# Altium PCB rxcalibrate.PcbDoc
Units mil, origin at the board's own origin, x right, y up, seen from the top; angles counter-clockwise.
Board outline 4846 x 4724 mil, 2 copper layers (Top Layer, Bottom Layer); 104 components, 82 nets, 278 pads, 103 vias.
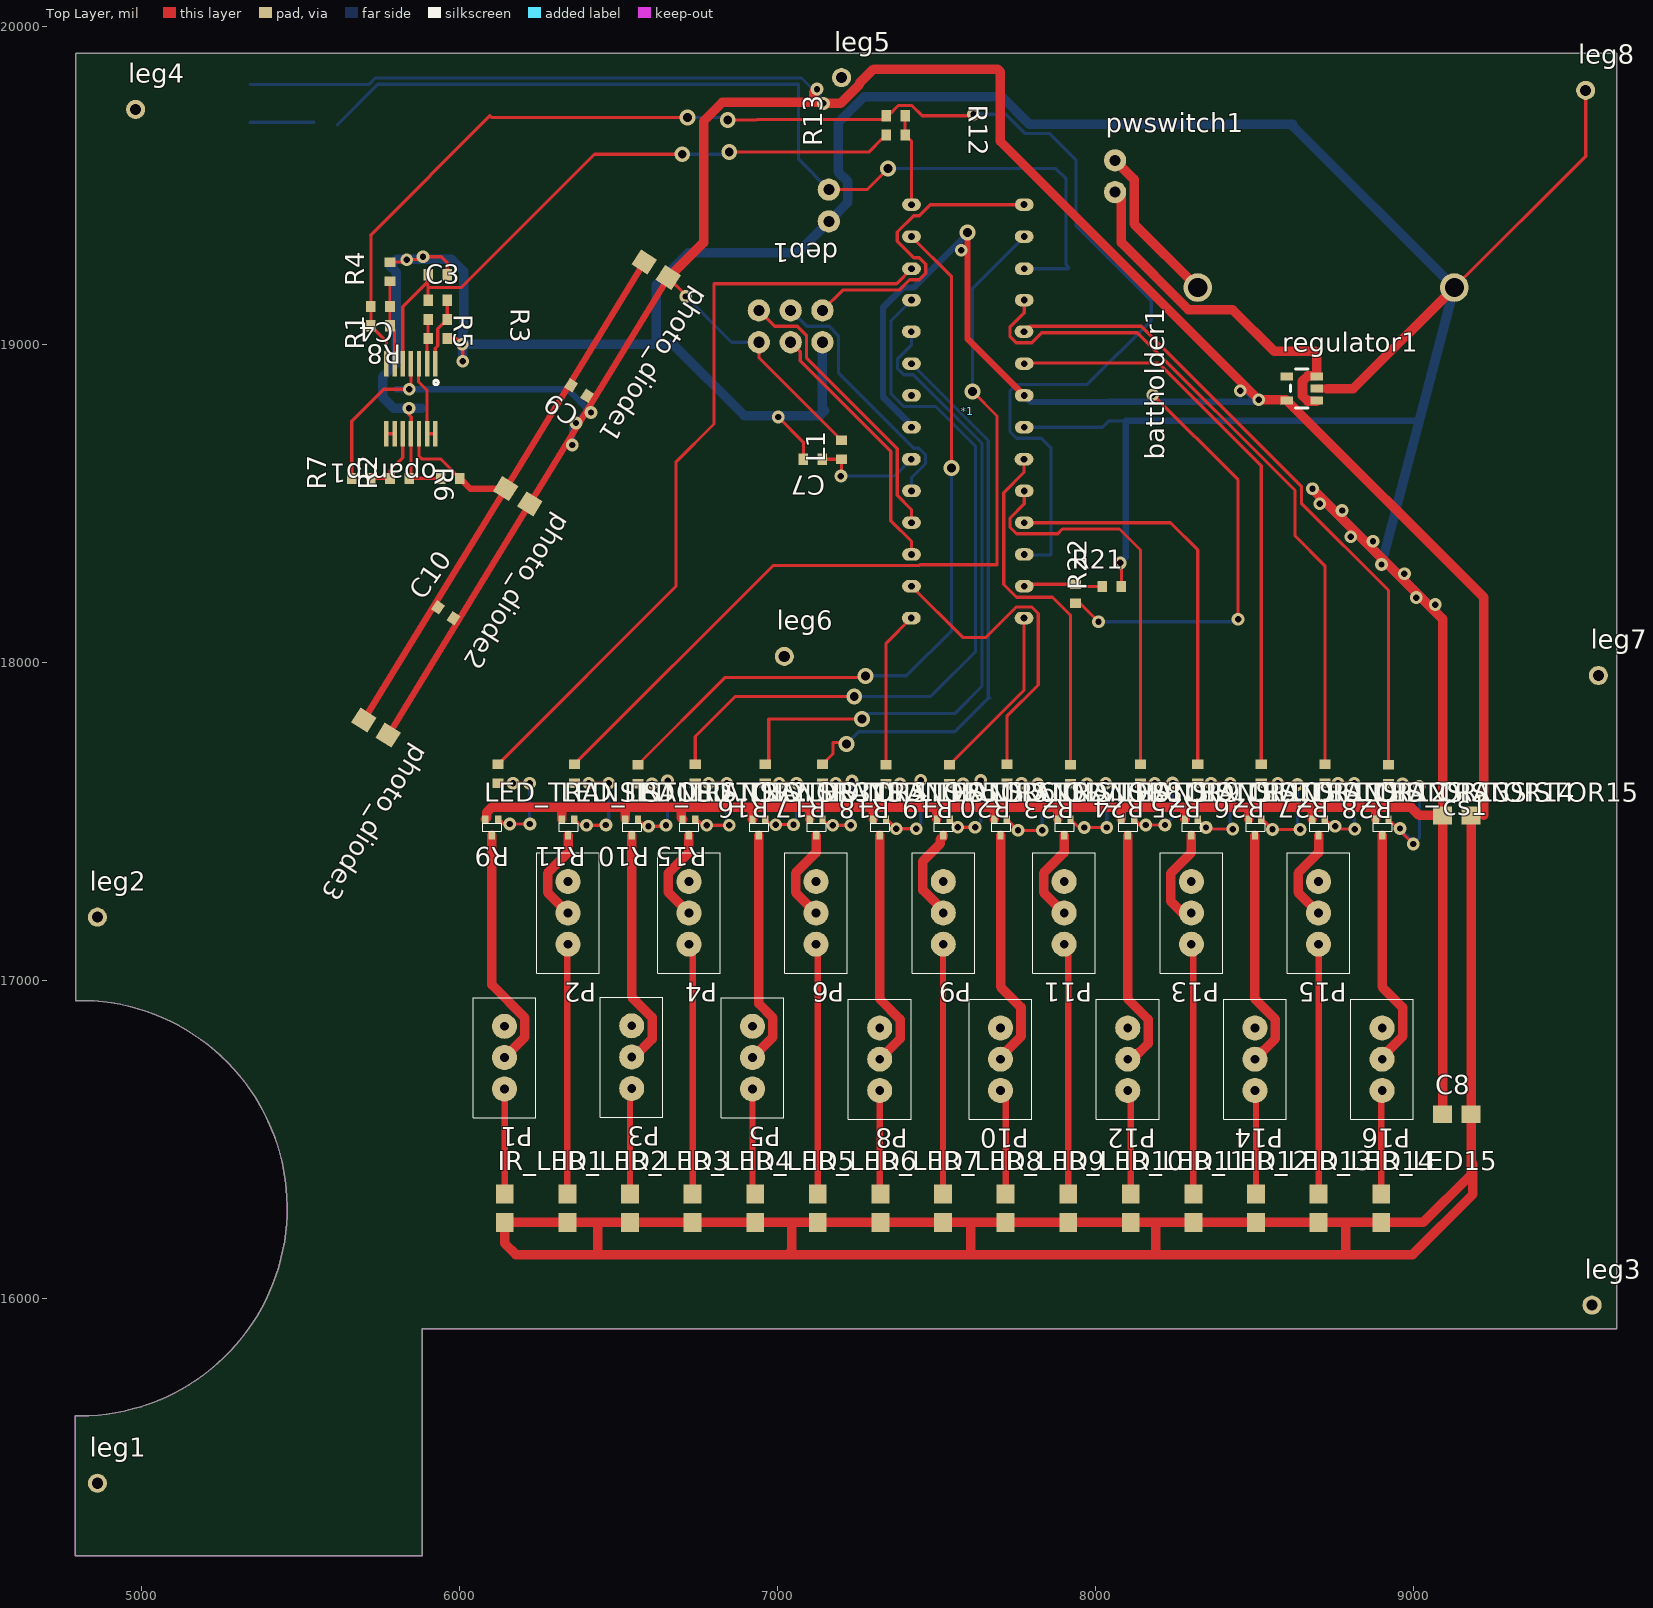
[diagram p0: Top Layer view]
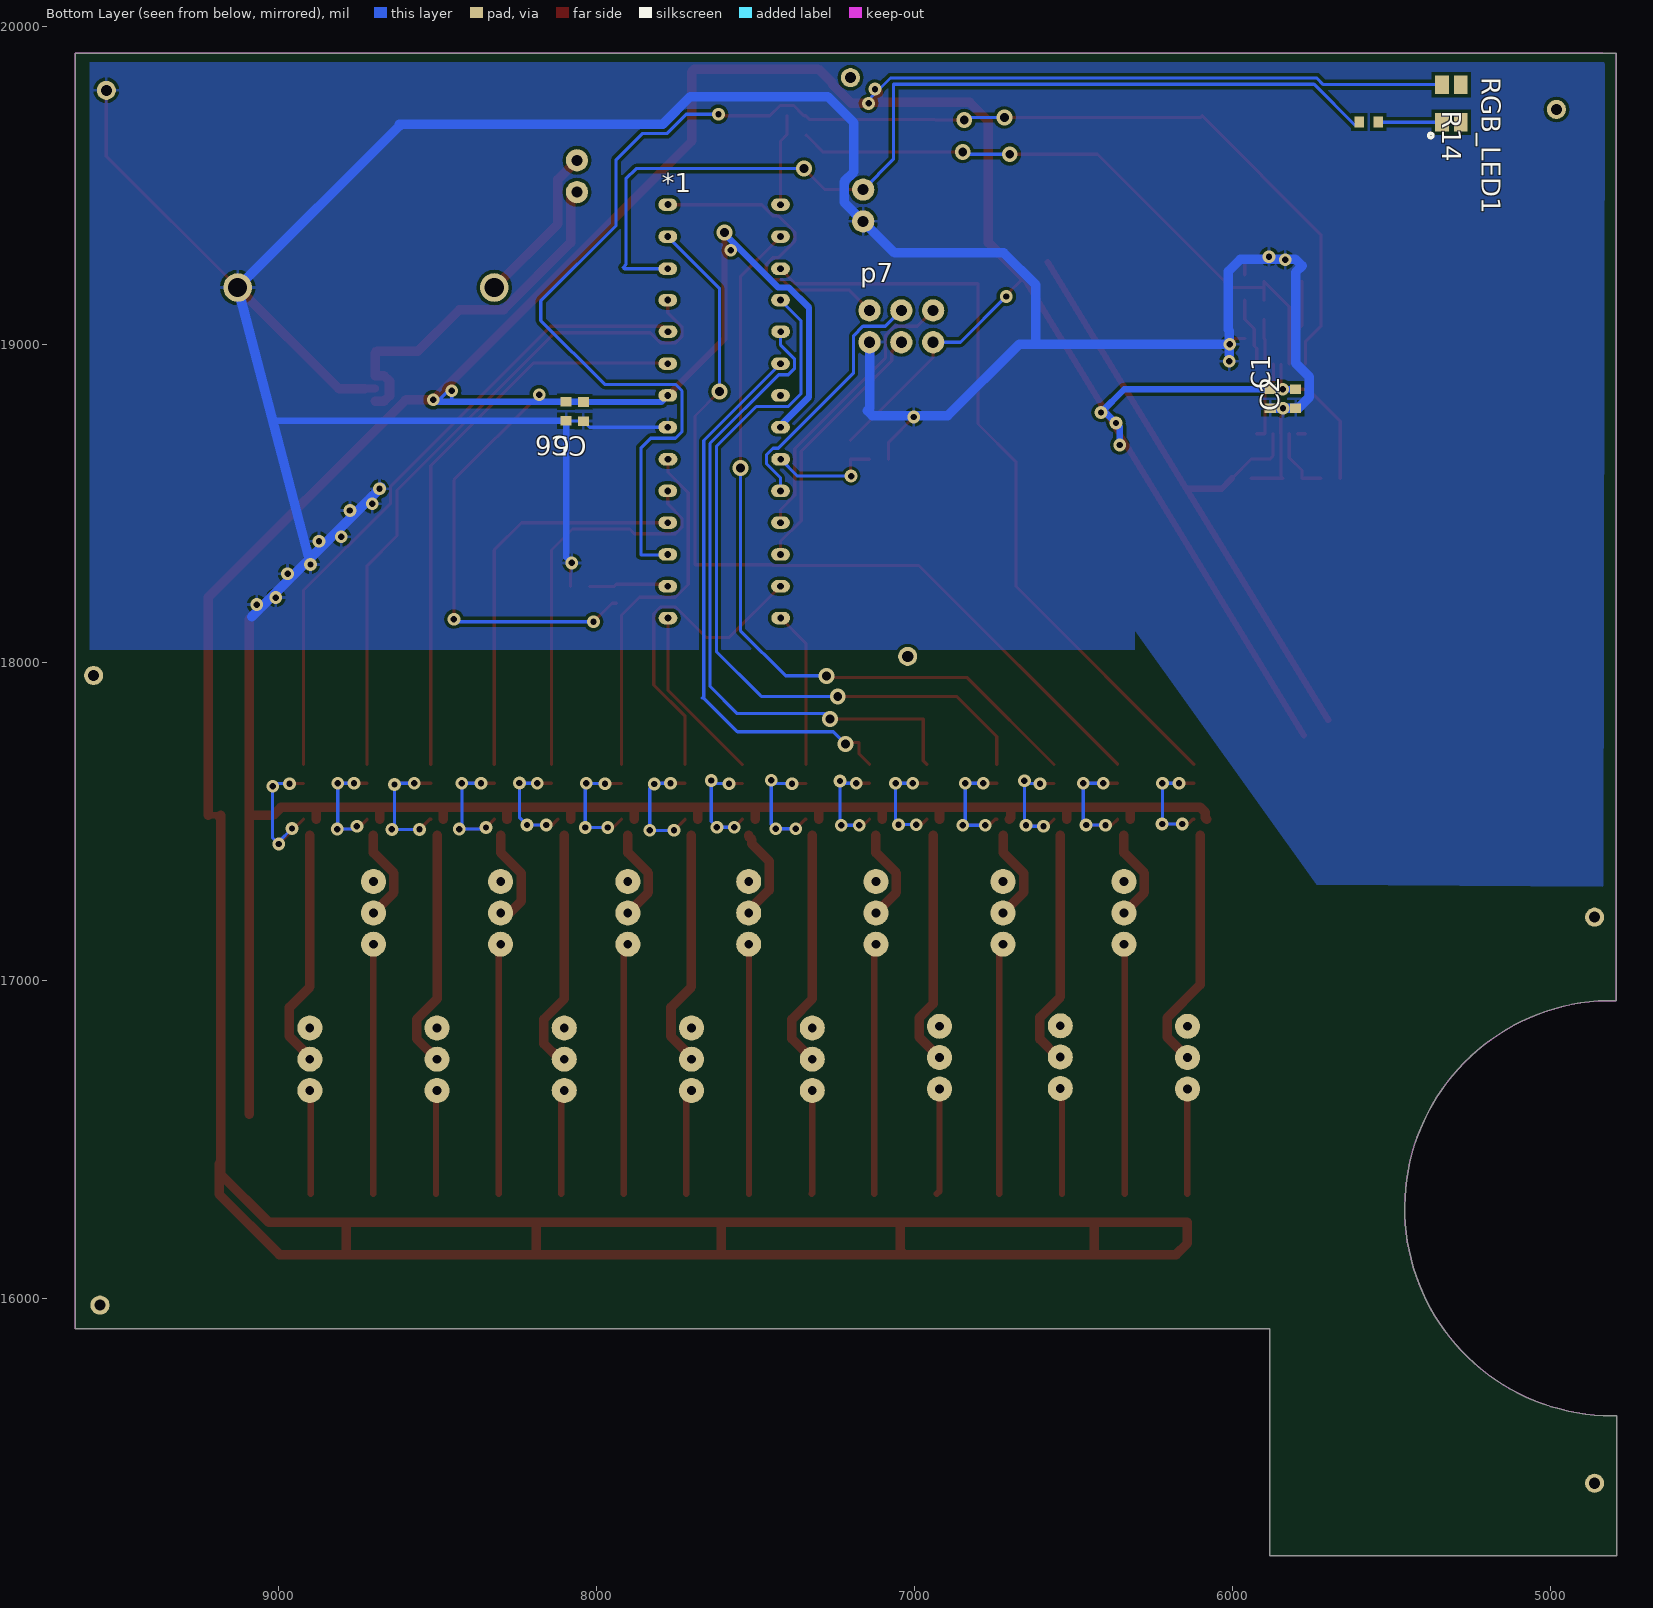
[diagram p1: Bottom Layer view, seen from below]

## Layer stack, top to bottom
Top Layer: signal copper 1.4
Dielectric: dielectric 12.6, FR-4, Dk 4.8
Bottom Layer: signal copper 1.4

## Board outline
4791,15192 4791,15632 4805,15632 ccw(c4804,16285) 4793.09,16937.91 4792,16937.91 4792,19916 9637,19916 9637,15905 5882,15905 5882,15192

## Design rules (kind name [scope] priority, off if disabled: settings)
Clearance [All] p1: gap=10
PolygonConnect [All] p1: connectstyle=Relief reliefconductorwidth=10 reliefentries=4 polygonreliefangle="90 Angle"
RoomDefinition rxcalibrate [InComponentClass('rxcalibrate')] p1: confinementstyle=ConfineIn formatcopy=TRUE lockcomponents=FALSE outline 9682,15220 10033,15220 10033,15428 9682,15428
RoutingVias [All] p1: holewidth=28 width=50 viastyle="Through Hole" minholewidth=28 minwidth=50 maxholewidth=28 maxwidth=50
SilkscreenOverComponentPads [All] p1: minsilkscreentomaskgap=10
SolderMaskExpansion [All] p1: expansion=4
Width [All] p1: maxlimit=30 minlimit=10 preferedwidth=10
27 further rules are at their usual default settings.

## Components (designator, comment, footprint, x,y, rotation, side; value= is the part's Value field where it differs from the comment)
*1 "atmega328_DIP28" atmega328dip 7774.33,19440.55 r180 bottom
battholder1 "battery_holder" Battery_mount 8919,19180 r180 top
C1 "2.2uf" RC0603 5880,18860 r90 bottom
C2 "10000pf" RC0603 5800,18860 r90 bottom
C3 "1000pf" RC0603 5960,19140 r0 top
C4 "160pf" RC0603 5720,19120 r180 top
C5 "10000pf" RC0603 8040,18760 r270 bottom
C6 "2.2uf" RC0603 8094.19,18760.69 r270 bottom
C7 "100nf" RC0603 7080,18640 r180 top
C8 "CAP0805" RC0805_CAP0805(Primary) 9090,16580 r0 top
C9 "2.2uf" RC0603 6349.68,18872.68 r147 top
C10 "2.2uf" RC0603 5930.85,18174.41 r145 top
cs1 "CAP0805" RC0805_CAP0805(Primary) 9090,17520 r0 top
deb1 "debug_plug" debug_conn 7160,19488 r270 top
IR_LED1 "VSMB1940X01" 0805 6141,16240 r90 top
IR_LED2 "VSMB1940X01" 0805 6337.85,16240 r90 top
IR_LED3 "VSMB1940X01" 0805 6534.7,16240 r90 top
IR_LED4 "VSMB1940X01" 0805 6731.55,16240 r90 top
IR_LED5 "VSMB1940X01" 0805 6928.4,16240 r90 top
IR_LED6 "VSMB1940X01" 0805 7125.25,16240 r90 top
IR_LED7 "VSMB1940X01" 0805 7322.1,16240 r90 top
IR_LED8 "VSMB1940X01" 0805 7518.95,16240 r90 top
IR_LED9 "VSMB1940X01" 0805 7715.8,16240 r90 top
IR_LED10 "VSMB1940X01" 0805 7912.65,16240 r90 top
IR_LED11 "VSMB1940X01" 0805 8109.5,16240 r90 top
IR_LED12 "VSMB1940X01" 0805 8306.35,16240 r90 top
IR_LED13 "VSMB1940X01" 0805 8503.2,16240 r90 top
IR_LED14 "VSMB1940X01" 0805 8700.05,16240 r90 top
IR_LED15 "VSMB1940X01" 0805 8896.91,16240 r90 top
L1 "LQM18FN100M00D" RC0603 7200,18700 r90 top
LED_TRANSISTOR1 "PBSS2515E,115" sot416 6100,17457 r90 top
LED_TRANSISTOR2 "PBSS2515E,115" sot416 6340,17457 r90 top
LED_TRANSISTOR3 "PBSS2515E,115" sot416 6540,17457 r90 top
LED_TRANSISTOR4 "PBSS2515E,115" sot416 6720,17457 r90 top
LED_TRANSISTOR5 "PBSS2515E,115" sot416 6940,17457 r90 top
LED_TRANSISTOR6 "PBSS2515E,115" sot416 7120,17457 r90 top
LED_TRANSISTOR7 "PBSS2515E,115" sot416 7320,17457 r90 top
LED_TRANSISTOR8 "PBSS2515E,115" sot416 7520,17457 r90 top
LED_TRANSISTOR9 "PBSS2515E,115" sot416 7700,17457 r90 top
LED_TRANSISTOR10 "PBSS2515E,115" sot416 7900,17457 r90 top
LED_TRANSISTOR11 "PBSS2515E,115" sot416 8100,17457 r90 top
LED_TRANSISTOR12 "PBSS2515E,115" sot416 8300,17457 r90 top
LED_TRANSISTOR13 "PBSS2515E,115" sot416 8500,17457 r90 top
LED_TRANSISTOR14 "PBSS2515E,115" sot416 8700,17457 r90 top
LED_TRANSISTOR15 "PBSS2515E,115" sot416 8900,17457 r90 top
leg1 "leg" leg 4860,15420 r90 top
leg2 "leg" leg 4860,17200 r90 top
leg3 "leg" leg 9560,15980 r90 top
leg4 "leg" leg 4980,19740 r90 top
leg5 "leg" leg 7200,19840 r90 top
leg6 "leg" leg 7020,18020 r90 top
leg7 "leg" leg 9580,17960 r90 top
leg8 "leg" leg 9540,19800 r90 top
opamp1 "MAX4487AUD" TSSOP14 5922.36,18940 r270 top
P1 "pot" POT_PV36W 6140,16856.85 r270 top
P2 "pot" POT_PV36W 6340,17311.85 r270 top
P3 "pot" POT_PV36W 6540,16858.43 r270 top
P4 "pot" POT_PV36W 6720,17311.85 r270 top
P5 "pot" POT_PV36W 6920,16856.85 r270 top
P6 "pot" POT_PV36W 7120,17311.85 r270 top
p7 "program_connector_atmega" Programming_connector 7140,19108 r180 bottom
P8 "pot" POT_PV36W 7320,16851.85 r270 top
P9 "pot" POT_PV36W 7520,17311.85 r270 top
P10 "pot" POT_PV36W 7700,16851.85 r270 top
P11 "pot" POT_PV36W 7900,17311.85 r270 top
P12 "pot" POT_PV36W 8100,16851.85 r270 top
P13 "pot" POT_PV36W 8300,17311.85 r270 top
P14 "pot" POT_PV36W 8500,16851.85 r270 top
P15 "pot" POT_PV36W 8700,17311.85 r270 top
P16 "pot" POT_PV36W 8900,16851.85 r270 top
photo_diode1 "TEMD7100X01" 0805 6580,19260 r327 top
photo_diode2 "TEMD7100X01" 0805 6143.68,18547.69 r328 top
photo_diode3 "TEMD7100X01" 0805 5698,17820 r328 top
pwswitch1 "debug_plug" debug_conn 8060,19480 r90 top
R1 "10 Kohm" RC0603 5900,19020 r180 top
R2 "750 K ohm" RC0603 5940,18580 r180 top
R3 "100Kohm" RC0603 5960,19080 r0 top
R4 "5600 ohm" RC0603 5900,19220 r180 top
R5 "31.6Kohm" RC0603 5780,19060 r0 top
R6 "10Kohm" RC0603 5720,18580 r0 top
R7 "10Kohm" RC0603 5780,18580 r180 top
R8 "2Kohm" RC0603 5780,19200 r270 top
R9 "RES0603" RC0603 6120,17621 r270 top
R10 "RES0603" RC0603 6560,17620 r270 top
R11 "RES0603" RC0603 6360,17621 r270 top
R12 "200 ohm" RC0603 7400,19720 r0 top
R13 "200 ohm" RC0603 7340,19660 r180 top
R14 "RES0603" RC0603 5540,19700 r180 bottom
R15 "RES0603" RC0603 6740,17621 r270 top
R16 "RES0603" RC0603 6960,17621 r270 top
R17 "RES0603" RC0603 7140,17621 r270 top
R18 "RES0603" RC0603 7340,17620 r270 top
R19 "RES0603" RC0603 7540,17620 r270 top
R20 "RES0603" RC0603 7720,17621 r270 top
R21 "20Kohm" RC0603 7936,18247 r90 top
R22 "2210 ohm" RC0603 8020,18240 r180 top
R23 "RES0603" RC0603 7920,17620 r270 top
R24 "RES0603" RC0603 8140,17621 r270 top
R25 "RES0603" RC0603 8320,17621 r270 top
R26 "RES0603" RC0603 8520,17621 r270 top
R27 "RES0603" RC0603 8720,17621 r270 top
R28 "RES0603" RC0603 8920,17620 r270 top
regulator1 "TC1016-3.0VCTTR" SOT23-5 8694.49,18825.2 r90 top
RGB_LED1 "LATBT66C-RS-1+ST7-35+P7Q7-35-20-R18-ZB" rgb_led 5340,19818 r180 bottom

## Footprints (in the part's own frame and the unit in brackets; to place one, negate y for a bottom-side part, rotate by r counter-clockwise, add the part's x,y. Pads: shape width x height; smd on the part's side, far side on the other; paste and mask are expansions set on the pad)
0805 [mil]
  rect 60x56 smd: 1(0,0) 2(90,0)
atmega328dip [mm]
  oval 1.5x1 hole 0.55 paste+0 mask+0.001: 0(0,0)
  oval 1.5x1 smd far side paste+0 mask+0.001: 0(0,0)
  oval 1.5x1 hole 0.54 paste+0 mask+0.001: 1(0.003,-2.548) 2(0,-5.12) 3(0,-7.62) 4(0.013,-10.142) 5(0,-12.7) 6(0,-15.24) 7(0,-17.78) 8(0.013,-20.334) 9(0,-22.86) 10(0,-25.4) 11(0,-27.94) 12(0,-30.48) 13(0.013,-33.018) 14(9.013,-33.018) 15(9,-30.48) 16(9,-27.94) 17(9,-25.4) 18(9,-22.86) 19(9.013,-20.334) 20(9,-17.78) 21(9,-15.24) 22(9,-12.7) 23(9.013,-10.142) 24(9,-7.62) 25(9,-5.12) 26(9.003,-2.548) 27(9,0)
Battery_mount [mil]
  round 90 hole 60: 1(599,0) 2(-208,0)
debug_conn [mil]
  round 70 hole 35: 1(0,0) 2(100,0)
leg [mil]
  round 60 hole 35: 1(0,0)
POT_PV36W [mm]
  round 2 hole 0.7 paste+0 mask+0.001: 0(0,0) 1(2.5,0) 2(5,0)
  silkscreen extent -2.3,-2.5 7.3,2.5
Programming_connector [mil]
  round 70 hole 35: 1(0,0) 2(100,0) 3(200,0) 4(200,-100) 5(100,-100) 6(0,-100)
RC0603 [mil]
  rect 30x35 smd: 1(0,0) 2(-60,0)
RC0805_CAP0805(Primary) [mil]
  rect 60x56 smd: A(0,0) B(90,0)
rgb_led [mil]
  rect 43x59 smd: 1(0,-118) 2(0,0) 3(59,0) 4(59,-118)
  silkscreen extent -42,-167 -28,-153
SOT23-5 [mil]
  rect 25x40 smd: 1(0,0) 2(37.4,0) 3(74.8,0) 4(74.8,94.49) 5(0,94.49)
  silkscreen extent -24,28 98,83
sot416 [mil]
  rect 24x20 smd: 1(51,-20) 2(51,20) 3(0,0)
  silkscreen extent 13,-30 38,30
TSSOP14 [mil]
  rect 80x14 smd: 1(0,0) 2(0,-25.59) 3(0,-51.18) 4(0,-76.77) 5(0,-102.36) 6(0,-127.95) 7(0,-153.54) 8(220,-153.54) 9(220,-127.95) 10(220,-102.36) 11(220,-76.77) 12(220,-51.18) 13(220,-25.59) 14(220,0)
  silkscreen extent 52,-4 65,9

## Part data
C1 C2 C3 C4 C5 C6 C7 C9 C10: library part CAP0603, "CAP0603"
IR_LED1 IR_LED2 IR_LED3 IR_LED4 IR_LED5 IR_LED6 IR_LED7 IR_LED8 IR_LED9 IR_LED10 IR_LED11 IR_LED12 IR_LED13 IR_LED14 IR_LED15: library part IRtx
L1: library part IND0603, "IND0603"
LED_TRANSISTOR1 LED_TRANSISTOR2 LED_TRANSISTOR3 LED_TRANSISTOR4 LED_TRANSISTOR5 LED_TRANSISTOR6 LED_TRANSISTOR7 LED_TRANSISTOR8 LED_TRANSISTOR9 LED_TRANSISTOR10 LED_TRANSISTOR11 LED_TRANSISTOR12 LED_TRANSISTOR13 LED_TRANSISTOR14 LED_TRANSISTOR15: library part transistor_led
opamp1: library part opamp
photo_diode1 photo_diode2 photo_diode3: library part IRrx
R1 R6 R7: library part RES0603, "RES0603 10Kohm"
R2: library part RES0603, "RES0603 750000 ohm"
R3: library part RES0603, "RES0603 100Kohm"
R4: library part RES0603, "RES0603 5600 ohm"
R5: library part RES0603, "RES0603 31.6Kohm"
R8: library part RES0603, "RES0603 2Kohm"
R12 R13: library part RES0603, "RES0603 200 ohm"
R21: library part RES0603, "RES0603 20Kohm"
R22: library part RES0603, "RES0603 2210 ohm"
regulator1: library part regulator_w_switch
RGB_LED1: library part rgb_led

## Via types
v1: diameter 40, hole 20, Top Layer to Bottom Layer, 91 vias
v2: diameter 50, hole 28, Top Layer to Bottom Layer, 12 vias

## Nets (pads, with @x,y where several pads share a name; then routed paths per layer and width w, separated by ;. In a path a pad name is that pad's centre, name@x,y a point inside that pad or via, vN(x,y) a via of type N, cw(c..) or ccw(c..) an arc to the next point about the centre after c; other vN are vias at no path point)
GND: *1.7 battholder1.2 C1.2 C2.2 C5.1 C6.1 C7.1 C8.A cs1.A deb1.2 LED_TRANSISTOR1.2 LED_TRANSISTOR2.2 LED_TRANSISTOR3.2 LED_TRANSISTOR4.2 LED_TRANSISTOR5.2 LED_TRANSISTOR6.2 LED_TRANSISTOR7.2 LED_TRANSISTOR8.2 LED_TRANSISTOR9.2 LED_TRANSISTOR10.2 LED_TRANSISTOR11.2 LED_TRANSISTOR12.2 LED_TRANSISTOR13.2 LED_TRANSISTOR14.2 LED_TRANSISTOR15.2 leg8.1 opamp1.11 p7.6 R1.2 R2.1 R4.2 R7.2 R8.2 R22.2 regulator1.2 | length 17113.6
  Top Layer w10: R8.2 5826,19260 5834,19268 v1@5892,19268 ; v1(5840,18800) 5840,18780 5847,18773 5847,18721.41 opamp1.11 5845.59,18585.59 R7.2 R2.1 ; v1(5884,19277) 5941,19277 5962,19256 5960,19254 R4.2 ; R1.2 5989,19020 6009,19000 v1(6009,18948) ; v1(7001,18773) 7080,18694 C7.1 ; v1(8076,18314) 8080,18310 R22.2 ; battholder1.2 9540,19593 leg8.1
  Top Layer w24: regulator1.2 8724.94,18862.6 8725.54,18862
  Top Layer w30: LED_TRANSISTOR1.2 6085,17513 6085,17530.36 6099.64,17545 8991,17545 9016,17520 cs1.A ; 6318,17545 6320,17543 LED_TRANSISTOR2.2 ; 6516,17545 6520,17541 LED_TRANSISTOR3.2 ; 6696,17545 6696,17512 LED_TRANSISTOR4.2 ; 6917,17545 6920,17542 LED_TRANSISTOR5.2 ; 7097,17545 7100,17542 LED_TRANSISTOR6.2 ; 7298,17545 7300,17543 LED_TRANSISTOR7.2 ; 7491,17545 7500,17536 LED_TRANSISTOR8.2 ; LED_TRANSISTOR9.2 7680,17541 7684,17545 ; LED_TRANSISTOR10.2 7880,17543 7882,17545 ; 8077,17545 8080,17542 LED_TRANSISTOR11.2 ; 8272,17545 8280,17537 LED_TRANSISTOR12.2 ; LED_TRANSISTOR13.2 8480,17537 8488,17545 ; 8675,17545 8680,17540 LED_TRANSISTOR14.2 ; v1(8681,18547) 9090,18138 cs1.A ; 8725.54,18862 8809,18862 battholder1.2 ; 8879,17545 8880,17544 LED_TRANSISTOR15.2 ; C8.A cs1.A
  Bottom Layer w10: *1.7 8020.55,18740.55 C5.1 8093.5,18760 C6.1
  Bottom Layer w20: v1(8076,18314) 8094.19,18332.19 C6.1 9012.86,18760.69 9015.94,18757.6
  Bottom Layer w30: C1.2 C2.2 5792.14,18800 5757.5,18834.64 5757.5,18900 5800,18942.5 5800,19228 5780,19248 5801,19269 5974,19269 6012,19231 6012,19047 6009,19044 6009,18968 ; v1(6007,19002) 6669,19002 6894,18777 7131,18777 7147,18793 7140,18800 p7.6 ; 6617,19002 6617,19188 6718,19289 7061,19289 deb1.2 7220,19448 7220,19512.85 7189,19543.85 7189,19698 7271,19780 7704,19780 7790,19694 8619,19694 8619,19688 battholder1.2 v1(8898,18309) ; v1@8676.26,18551.47 v1(8681,18547) 9082,18145
  other v1: 9067,18183 9007,18205 8970,18280 8871,18382 8801,18396 8774,18479 8704,18500 5833,19267
Net*1_0: *1.0 p7.1 | length 984.1
  Top Layer w10: p7.1 7204,19172 7381.31,19172 7413.6,19204.29 7444.21,19204.29 7464.53,19224.61 7464.53,19253.34 7444.21,19273.66 7427.56,19273.66 7375.35,19325.87 7375.35,19354.6 7426.62,19405.87 7444.21,19405.87 7478.89,19440.55 *1.0@7774.33,19440.55
Net*1_1: *1.1 R11.2 | length 2720
  Top Layer w10: R11.2 6984.87,18305.87 7444.21,18305.87 7446.34,18308 7689,18308 7689,18776 v2(7612,18853)
  Bottom Layer w10: v2(7612,18853) 7612,19178.02 *1.1
Net*1_2: *1.2 deb1.1 R14.2 | length 3084.6
  Top Layer w10: deb1.1 7280,19488 v2(7346,19554)
  Bottom Layer w10: 5615,19692 5742,19819 7065,19819 7065,19583 deb1.1 ; v2(7346,19554) 7874,19554 7906,19522 7906,19252 7915,19243 7910.98,19238.98 *1.2
Net*1_3: *1.3 R27.2 | length 2155.8
  Top Layer w10: *1.3 7774.33,19100.67 7729.29,19055.63 7729.29,19026.89 7749.61,19006.57 7798.03,19006.57 7829.45,19038 8130,19038 8626,18542 8626,18399.22 8720,18305.22 R27.2
Net*1_4: *1.4 R28.2 | length 2076
  Top Layer w10: *1.4 7790.56,19058 8143,19058 8646,18555 8646,18501.5 8920,18227.5 R28.2
Net*1_5: *1.5 R26.2 | length 1818.8
  Top Layer w10: *1.5 7776.14,18942.36 8197.36,18942.36 8520,18619.72 R26.2
Net*1_8: *1.8 R23.2 | length 1159.1
  Top Layer w10: 7709.8,18417.9 7709.8,18534.92 7773.82,18598.93 *1.8 ; 7709.8,18437 7709.8,18246.18 7750.12,18205.87 7863.42,18205.87 7903.5,18165.79 7920,18149.29 R23.2
Net*1_9: *1.9 R24.2 | length 1258.4
  Top Layer w10: *1.9 7774.33,18499.45 7729.8,18454.92 7729.8,18426.18 7750.12,18405.87 7879.65,18405.87 7894.33,18420.55 8074,18420.55 8140,18354.55 R24.2
Net*1_10: *1.10 R25.2 | length 1255.1
  Top Layer w10: *1.10 8234.45,18440.55 8320,18355 R25.2
Net*1_11: *1.11 C4.1 opamp1.7 R5.2 R12.2 | length 4738.2
  Top Layer w10: opamp1.7 5768.82,19011.18 R5.2 C4.1 5720,19344 5719,19345 6094,19720 6099,19715 v2(6716,19715) ; v2(6842,19707) 6933,19707 6934,19708 7328,19708 R12.2 7346.29,19720 7378.79,19752.5 7421.21,19752.5 7453.71,19720 7610,19720 v1(7615,19725)
  Bottom Layer w10: v2(6716,19715) 6834,19715 v2(6842,19707) ; v1(7615,19725) 7716.57,19725 7777.57,19664 7855,19664 7937,19582 7937,19375 8174,19138 8174,19076 7973.24,18875.24 7750.12,18875.24 7729.8,18854.92 7729.8,18726.18 7750.12,18705.87 7827.91,18705.87 7859,18674.78 7859,18339 7775.88,18339 *1.11
Net*1_12: *1.12 R21.1 R22.1 | length 251.2
  Top Layer w10: *1.12 7780.78,18247 R21.1 7943,18240 R22.1
Net*1_13: *1.13 R19.2 | length 557.5
  Top Layer w10: R19.2 7773.82,17913.82 *1.13
Net*1_14: *1.14 R18.2 | length 493.6
  Top Layer w10: R18.2 7340,18061.14 *1.14
Net*1_15: *1.15 R20.2 | length 1027.5
  Top Layer w10: *1.15 7580.63,18079.92 7654.22,18079.92 7749.61,18175.31 7798.03,18175.31 7818.35,18155 7818.35,17930.06 7720,17831.72 R20.2
Net*1_16: *1.16 p7.5 | length 824.8
  Top Layer w10: p7.5 7070,18978 7070,18949.72 7354.96,18664.76 7354.96,18446.7 7420,18381.66 *1.16
Net*1_17: *1.17 p7.3 | length 907.7
  Top Layer w10: p7.3 6990,19058 7060.71,19058 7090,19028.71 7090,18958 7374.96,18673.04 7374.96,18526.7 7420,18481.66 *1.17
Net*1_18: *1.18 p7.2 | length 812.5
  Bottom Layer w10: p7.2 7090,19058 7160.71,19058 7190,19028.71 7190,18911.66 7426.97,18674.69 7443.7,18674.69 7464.02,18654.37 7464.02,18625.63 7420,18581.62 *1.18
Net*1_19: *1.19 C7.2 L1.2 | length 357.3
  Top Layer w10: C7.2 L1.2 7200,18589 v1(7198,18587)
  Bottom Layer w10: v1(7198,18587) 7366.49,18587 *1.19
Net*1_22: *1.22 R17.2 | length 1787.6
  Top Layer w10: R17.2 7173,17714 7173,17749 7212,17749 v2(7216,17745)
  Bottom Layer w10: v2(7216,17745) 7254,17783 7555.57,17783 7661.57,17889 ; *1.22 7661.57,18698.98 7661.57,17889 ; 7666,17889 7661.57,17889
Net*1_23: *1.23 R16.2 | length 2121.3
  Top Layer w10: R16.2 6971,17692 6971,17823 v2(7264,17823)
  Bottom Layer w10: v2(7264,17823) 7281,17840 7556,17840 7641.57,17925.57 7641.57,18690 7425.7,18905.87 7395.79,18905.87 7375.47,18926.18 7375.47,18954.92 7419.49,18998.93 *1.23
Net*1_24: *1.24 R15.2 | length 2379.9
  Top Layer w10: R15.2 6740,17768 6866,17894 v2(7240,17894)
  Bottom Layer w10: v2(7240,17894) 7480,17894 7485,17899 7621.57,18035.57 7621.57,18680 7495.7,18805.87 7395.79,18805.87 7355.47,18846.18 7355.47,19075.94 7420,19140.47 *1.24
Net*1_25: *1.25 R9.2 | length 2432.7
  Top Layer w10: R9.2 6679,18240 6679,18631 6799,18751 6799,19192 7373.02,19192 *1.25
Net*1_26: *1.26 R10.2 | length 2453
  Top Layer w10: R10.2 6834,17954 7272,17954 7275,17957 v2(7275,17959) ; *1.26 7546,19214.12 v2(7546,18612)
  Bottom Layer w10: v2(7275,17959) 7404,17959 7546,18101 v2(7546,18612)
Net*1_27: *1.27 R12.1 R13.2 | length 287.7
  Top Layer w10: R12.1 R13.2 7420,19640 *1.27
Netbattholder1_1: battholder1.1 pwswitch1.2 | length 507.7
  Top Layer w30: pwswitch1.2 8120,19520 8120,19380 battholder1.1
NetC3_1: C3.1 opamp1.1 R3.1 | length 215.6
  Top Layer w10: opamp1.1 5922.36,18988.65 5930,18996.29 5930,19050 R3.1 C3.1
NetC3_2: C3.2 opamp1.5 R4.1 R13.1 | length 1992
  Top Layer w10: opamp1.5 5820,19120 5900,19200 5900,19180 ; C3.2 5900,19180 ; v2(6699,19599) 6423,19599 6004,19180 5900,19180 ; v2(6847,19606) 7286,19606 7332,19652 R13.1
  Bottom Layer w10: v2(6699,19599) 6840,19599 v2(6847,19606)
NetC4_2: C4.2 opamp1.6 R5.1 R8.1 | length 266
  Top Layer w10: R8.1 R5.1 5794.41,19045.59 opamp1.6
NetC9_1: C9.1 C10.1 opamp1.12 photo_diode1.1 photo_diode2.1 photo_diode3.1 R2.2 | length 2073.6
  Top Layer w10: opamp1.12 5871.18,18649.82 5880,18641 5939,18641 R2.2
  Top Layer w20: photo_diode3.1 photo_diode2.1 ; R2.2 6032.31,18547.69 photo_diode2.1 ; photo_diode1.1 photo_diode2.1
NetIR_LED1_2: IR_LED1.2 P1.2 | length 330.4
  Top Layer w20: P1.2 6141,16659 IR_LED1.2
NetIR_LED2_2: IR_LED2.2 P2.2 | length 785.9
  Top Layer w20: IR_LED2.2 6337.85,17112.85 P2.2
NetIR_LED3_2: IR_LED3.2 P3.2 | length 333.8
  Top Layer w20: IR_LED3.2 6534.7,16656.27 P3.2
NetIR_LED4_2: IR_LED4.2 P4.2 | length 789.8
  Top Layer w20: P4.2 6731.55,17103.45 IR_LED4.2
NetIR_LED5_2: IR_LED5.2 P5.2 | length 333.5
  Top Layer w20: P5.2 6920,16338.4 IR_LED5.2
NetIR_LED6_2: IR_LED6.2 P6.2 | length 787.2
  Top Layer w20: P6.2 7125.25,17109.75 IR_LED6.2
NetIR_LED7_2: IR_LED7.2 P8.2 | length 325.9
  Top Layer w20: P8.2 7320,16332.1 IR_LED7.2
NetIR_LED8_2: IR_LED8.2 P9.2 | length 785.4
  Top Layer w20: IR_LED8.2 7518.95,17113.95 P9.2
NetIR_LED9_2: IR_LED9.2 P10.2 | length 331.5
  Top Layer w20: P10.2 7715.8,16639.2 IR_LED9.2
NetIR_LED10_2: IR_LED10.2 P11.2 | length 790.2
  Top Layer w20: P11.2 7912.65,17102.35 IR_LED10.2
NetIR_LED11_2: IR_LED11.2 P12.2 | length 328.9
  Top Layer w20: P12.2 8109.5,16645.5 IR_LED11.2
NetIR_LED12_2: IR_LED12.2 P13.2 | length 787.6
  Top Layer w20: P13.2 8306.35,17108.65 IR_LED12.2
NetIR_LED13_2: IR_LED13.2 P14.2 | length 326.3
  Top Layer w20: P14.2 8503.2,16651.8 IR_LED13.2
NetIR_LED14_2: IR_LED14.2 P15.2 | length 785
  Top Layer w20: P15.2 P15.2 IR_LED14.2
NetIR_LED15_2: IR_LED15.2 P16.2 | length 326.3
  Top Layer w20: IR_LED15.2 8896.91,16651.9 P16.2
NetLED_TRANSISTOR1_1: LED_TRANSISTOR1.1 R9.1 | length 448.6
  Top Layer w10: LED_TRANSISTOR1.1 6123,17508 6138,17493 v1(6220,17493) ; R9.1 v1(6219,17621)
  Bottom Layer w10: v1(6157,17493) v1(6220,17493) 6219,17494 v1(6219,17621) v1(6167,17621)
NetLED_TRANSISTOR1_3: LED_TRANSISTOR1.3 P1.1 | length 768.5
  Top Layer w30: LED_TRANSISTOR1.3 6100,16987.88 6204.37,16883.51 6204.37,16822.8 P1.1
NetLED_TRANSISTOR2_1: LED_TRANSISTOR2.1 R11.1 | length 459.8
  Top Layer w10: LED_TRANSISTOR2.1 6379,17489 6458,17489 v1(6459,17490) ; R11.1 6452,17621 v1@6453,17620
  Bottom Layer w10: v1(6398,17489) 6399,17490 v1(6459,17490) 6468,17499 v1(6468,17621) v1(6405,17621)
NetLED_TRANSISTOR2_3: LED_TRANSISTOR2.3 P2.1 | length 296.9
  Top Layer w30: P2.1 6275.63,17277.8 6275.63,17338.51 6340,17402.88 LED_TRANSISTOR2.3
NetLED_TRANSISTOR3_1: LED_TRANSISTOR3.1 R10.1 | length 439
  Top Layer w10: LED_TRANSISTOR3.1 6578,17490 6578,17486 6645,17486 v1(6648,17489) ; R10.1 6643,17620 v1@6646,17623
  Bottom Layer w10: v1(6593,17486) 6645,17486 6653,17494 v1(6653,17629) 6644,17620 v1(6604,17620)
NetLED_TRANSISTOR3_3: LED_TRANSISTOR3.3 P3.1 | length 755
  Top Layer w30: P3.1 6548,16760 6604.37,16816.37 6604.37,16885.09 6540,16949.46 LED_TRANSISTOR3.3
NetLED_TRANSISTOR4_1: LED_TRANSISTOR4.1 R15.1 | length 481.4
  Top Layer w10: LED_TRANSISTOR4.1 6745,17508 6764,17489 v1(6847,17489) v1@6848,17490 ; R15.1 v1(6839,17621) v1@6841,17619
  Bottom Layer w10: v1(6776,17489) v1(6847,17489) 6839,17497 v1(6839,17621) v1(6782,17621)
NetLED_TRANSISTOR4_3: LED_TRANSISTOR4.3 P4.1 | length 296.9
  Top Layer w30: P4.1 6655.63,17277.8 6655.63,17338.51 6720,17402.88 LED_TRANSISTOR4.3
NetLED_TRANSISTOR5_1: LED_TRANSISTOR5.1 R16.1 | length 415.8
  Top Layer w10: LED_TRANSISTOR5.1 6977,17491 v1@7038,17491 ; R16.1 v1@7047,17621
  Bottom Layer w10: v1(6993,17491) v1(7049,17491) 7058,17500 v1(7058,17621) v1(7004,17621)
NetLED_TRANSISTOR5_3: LED_TRANSISTOR5.3 P5.1 | length 743.6
  Top Layer w30: P5.1 6984.37,16822.8 6984.37,16883.51 6940,16927.88 LED_TRANSISTOR5.3
NetLED_TRANSISTOR6_1: LED_TRANSISTOR6.1 R17.1 | length 423.8
  Top Layer w10: LED_TRANSISTOR6.1 7159,17489 v1(7229,17489) ; R17.1 7214,17621 v1@7215,17622
  Bottom Layer w10: v1(7172,17489) v1(7229,17489) 7233,17493 v1(7233,17628) 7226,17621 v1(7182,17621)
NetLED_TRANSISTOR6_3: LED_TRANSISTOR6.3 P6.1 | length 296.9
  Top Layer w30: P6.1 7055.63,17277.8 7055.63,17338.51 7120,17402.88 LED_TRANSISTOR6.3
NetLED_TRANSISTOR7_1: LED_TRANSISTOR7.1 R18.1 | length 509
  Top Layer w10: LED_TRANSISTOR7.1 7342,17508 v1(7372,17478) 7442,17478 v1@7443,17479 ; R18.1 7439,17620 v1@7441,17622
  Bottom Layer w10: v1(7372,17478) v1(7435,17478) 7449,17492 v1(7449,17631) 7438,17620 v1(7384,17620)
NetLED_TRANSISTOR7_3: LED_TRANSISTOR7.3 P8.1 | length 756.9
  Top Layer w30: P8.1 7384.37,16817.8 7384.37,16878.51 7320,16942.88 LED_TRANSISTOR7.3
NetLED_TRANSISTOR8_1: LED_TRANSISTOR8.1 R19.1 | length 443.8
  Top Layer w10: LED_TRANSISTOR8.1 v1(7565,17483) v1(7620,17483) ; R19.1 7621,17620 v1@7623,17622
  Bottom Layer w10: v1(7565,17483) v1(7620,17483) 7638,17501 v1(7638,17630) 7628,17620 v1(7582,17620)
NetLED_TRANSISTOR8_3: LED_TRANSISTOR8.3 P9.1 | length 296.9
  Top Layer w30: P9.1 7520,17220.82 7455.63,17285.19 7455.63,17376.22 7510,17430.59 7510,17444 7520,17454 LED_TRANSISTOR8.3
NetLED_TRANSISTOR9_1: LED_TRANSISTOR9.1 R20.1 | length 495.5
  Top Layer w10: LED_TRANSISTOR9.1 v1(7755,17473) v1(7831,17473) v1@7832,17474 ; R20.1 v1@7809,17621
  Bottom Layer w10: v1(7755,17473) v1(7831,17473) 7831,17605 7815,17621 v1(7766,17621)
  other v1: 7817,17619
NetLED_TRANSISTOR9_3: LED_TRANSISTOR9.3 P10.1 | length 756.9
  Top Layer w30: P10.1 7700,16760.82 7764.37,16825.19 7764.37,16916.22 7700,16980.59 LED_TRANSISTOR9.3
NetLED_TRANSISTOR10_1: LED_TRANSISTOR10.1 R23.1 | length 508.8
  Top Layer w10: LED_TRANSISTOR10.1 7945,17483 7945,17482 v1(8034,17482) v1@8035,17483 ; R23.1 8030,17620 v1(8031,17621)
  Bottom Layer w10: v1(7963,17482) v1(8034,17482) 8034,17618 v1(8031,17621) 8030,17620 v1(7972,17620)
NetLED_TRANSISTOR10_3: LED_TRANSISTOR10.3 P11.1 | length 296.9
  Top Layer w30: P11.1 7835.63,17277.8 7835.63,17338.51 7900,17402.88 LED_TRANSISTOR10.3
NetLED_TRANSISTOR11_1: LED_TRANSISTOR11.1 R24.1 | length 448.6
  Top Layer w10: LED_TRANSISTOR11.1 8136,17492 8136,17490 v1(8217,17490) v1@8220,17487 ; R24.1 8219,17621 8220,17620
  Bottom Layer w10: v1(8157,17490) v1(8217,17490) 8241,17514 v1(8241,17622) 8240,17621 v1(8185,17621)
NetLED_TRANSISTOR11_3: LED_TRANSISTOR11.3 P12.1 | length 765.9
  Top Layer w30: P12.1 8115.43,16753.43 8164.37,16802.37 8164.37,16878.51 8100,16942.88 LED_TRANSISTOR11.3
NetLED_TRANSISTOR12_1: LED_TRANSISTOR12.1 R25.1 | length 531.6
  Top Layer w10: LED_TRANSISTOR12.1 v1(8346,17482) 8346,17477 8439,17477 v1@8440,17478 ; R25.1 v1(8422,17621)
  Bottom Layer w10: v1(8346,17482) 8351,17477 v1(8430,17477) 8422,17485 v1(8422,17621) v1(8362,17621)
NetLED_TRANSISTOR12_3: LED_TRANSISTOR12.3 P13.1 | length 313.6
  Top Layer w30: P13.1 8271.57,17213.43 8235.63,17249.37 8235.63,17338.51 8300,17402.88 LED_TRANSISTOR12.3
NetLED_TRANSISTOR13_1: LED_TRANSISTOR13.1 R26.1 | length 545.9
  Top Layer w10: LED_TRANSISTOR13.1 8523,17508 v1(8555,17476) v1(8642,17476) ; R26.1 8630,17621 v1(8634,17617)
  Bottom Layer w10: v1(8555,17476) v1(8642,17476) 8634,17484 v1(8634,17617) 8630,17621 v1(8572,17621)
NetLED_TRANSISTOR13_3: LED_TRANSISTOR13.3 P14.1 | length 756.9
  Top Layer w30: P14.1 8564.37,16817.8 8564.37,16878.51 8500,16942.88 LED_TRANSISTOR13.3
NetLED_TRANSISTOR14_1: LED_TRANSISTOR14.1 R27.1 | length 487.8
  Top Layer w10: LED_TRANSISTOR14.1 8751,17477 8829,17477 v1@8830,17478 ; R27.1 v1@8823,17621
  Bottom Layer w10: v1(8752,17486) 8761,17477 v1(8814,17477) 8812,17479 v1(8812,17621) v1(8761,17621)
NetLED_TRANSISTOR14_3: LED_TRANSISTOR14.3 P15.1 | length 296.9
  Top Layer w30: P15.1 8635.63,17277.8 8635.63,17338.51 8700,17402.88 LED_TRANSISTOR14.3
NetLED_TRANSISTOR15_1: LED_TRANSISTOR15.1 R28.1 | length 508.5
  Top Layer w10: LED_TRANSISTOR15.1 v1(8998,17430) v1@9001,17430 ; R28.1 8997,17620 v1@9001,17616
  Bottom Layer w10: v1(8956,17479) 8998,17437 v1(8998,17430) 9017,17449 v1(9017,17612) 9009,17620 v1(8964,17620)
NetLED_TRANSISTOR15_3: LED_TRANSISTOR15.3 P16.1 | length 756.9
  Top Layer w30: P16.1 8900,16760.82 8964.37,16825.19 8964.37,16916.22 8900,16980.59 LED_TRANSISTOR15.3
Netopamp1_2: opamp1.2 R1.1 R3.2 | length 141.3
  Top Layer w10: opamp1.2 5896.77,19016.77 R1.1 R3.2
Netopamp1_3: opamp1.3 opamp1.13 opamp1.14 | length 257.2
  Top Layer w10: opamp1.3 5870,18938.82 5870,18883 5896.77,18856.23 opamp1.13 opamp1.14
Netopamp1_8: opamp1.8 opamp1.9 | length 25.6
  Top Layer w10: opamp1.8 opamp1.9
Netopamp1_10: opamp1.10 R6.1 R7.1 | length 216.6
  Top Layer w10: R6.1 R7.1 5780,18605 5820,18645 opamp1.10
Netpwswitch1_1: pwswitch1.1 regulator1.1 regulator1.3 | length 1147.7
  Top Layer w30: pwswitch1.1 8080,19460 8080,19321.01 8291.01,19110 8430,19110 8560,18980 8690,18980 8694.49,18975.51 8694.49,18902.6 8666.63,18902.6 8649.49,18885.45 8649.49,18839.74 8666.63,18822.6 regulator1.1@8694.49,18822.6
NetR14_1: R14.1 RGB_LED1.1 | length 200
  Bottom Layer w10: RGB_LED1.1 R14.1
VCC: *1.6 *1.20 C1.1 C2.1 C5.2 C6.2 C8.B C9.2 C10.2 cs1.B IR_LED1.1 IR_LED2.1 IR_LED3.1 IR_LED4.1 IR_LED5.1 IR_LED6.1 IR_LED7.1 IR_LED8.1 IR_LED9.1 IR_LED10.1 IR_LED11.1 IR_LED12.1 IR_LED13.1 IR_LED14.1 IR_LED15.1 L1.1 opamp1.4 p7.4 photo_diode1.2 photo_diode2.2 photo_diode3.2 R6.2 R21.2 regulator1.5 RGB_LED1.2 | length 21905.9
  Top Layer w10: R6.2 5660,18760 ; 5668.2,18768.2 5660,18760 ; v1@5840.61,18860 v1(5841,18860) ; opamp1.4 5845.59,18864.59 v1(5841,18860) ; photo_diode1.2 6710,19156.46 v1(6710,19152) ; p7.4 6940,18960 L1.1 ; R21.2 7950,18187 v1(8008,18129) ; v1(8179,18843) 8447,18575 v1(8447,18137) ; regulator1.5@8598.2,18827 regulator1.5 ; 5660,18760 5760,18860 v1(5841,18860)
  Top Layer w20: photo_diode3.2 photo_diode2.2 photo_diode1.2 ; v2(7596,19353) 7596,19018.88 *1.6 ; cs1.B@9188,17512 cs1.B 9220,17520
  Top Layer w30: 6436,16139 6433,16142 6433,16240 ; photo_diode1.2 6766,19321.5 6766,19703 6825.5,19762.5 7139.5,19762.5 v1(7143,19759) 7196.78,19759 7255,19817.22 7255,19821 7301,19867 7691,19867 7699,19859 7699,19813 7699,19640 v1(8512,18827) regulator1.5@8598.2,18827 ; 7031,16139 7043,16151 7043,16240 ; 7113,19762.5 7113,19794 v1(7123,19804) ; 7599,16139 7606,16146 7606,16240 ; 8197,16139 8188,16148 8188,16240 ; regulator1.5 9220,18205.2 9220,17520 ; 8791,16139 8786,16144 8786,16240 ; cs1.B 9180,16391 9029,16240 8786,16240 ; 9185,16425 9185,16328 8996,16139 6176,16139 6141,16174 IR_LED1.1 6433,16240 ; 6433,16240 7043,16240 ; 7043,16240 7606,16240 ; 7606,16240 8188,16240 ; 8188,16240 8786,16240
  Bottom Layer w10: RGB_LED1.2 5712.72,19818 5733.72,19839 7074,19839 7134,19779 ; v1(6710,19152) 6854,19008 p7.4 ; v1(8008,18129) 8439,18129 v1(8447,18137) ; v1(8454,18855) 8454,18823.69 8451,18820.69 8505.69,18820.69 v1(8512,18827) 8493,18827 v1@8466,18854
  Bottom Layer w20: C2.1 C1.1 6339,18860 v1(6412,18787) 6398,18787 6353,18742 v1(6353,18685) ; *1.20 7420,18746.3 7330.47,18835.83 7330.47,19116.99 7393.72,19180.24 7427.23,19180.24 7596,19349.01 v2(7596,19353) ; *1.6 7794.88,18820 C5.2 8040.69,18820.69 C6.2 v1@8505.69,18820.69
  other v1: 6365,18754 7576,19297
pads on no net: *1.21 leg1.1 leg2.1 leg3.1 leg4.1 leg5.1 leg6.1 leg7.1 P1.0 P2.0 P3.0 P4.0 P5.0 P6.0 P8.0 P9.0 P10.0 P11.0 P12.0 P13.0 P14.0 P15.0 P16.0 regulator1.4 RGB_LED1.3 RGB_LED1.4

## Polygon pours and split planes (outlines as drawn)
GND on Bottom Layer "Bottom Layer-No Net" (solid): 4828,19888 9592,19888 9592,19877 9592,18041 9455,18041 6306,18041 6306,18102 5734,17302 4832,17295

## Keep-outs
Keep-Out Layer:
  lines w0.1: 4792,19916 4792,16937.91 4793.09,16937.91 ; 4805,15632 4791,15632 4791,15192 5882,15192 5882,15905 9637,15905 9637,16076 9637,19916 4835,19916
  lines w1: 4793.09,16937.91 cw(c4804,16285) 4805,15632